# Altium PCB PCB1.PcbDoc
Units mil, origin at the board's own origin, x right, y up, seen from the top; angles counter-clockwise.
Board outline 669.29 x 5873.62 mil, 2 copper layers (Top Layer, Bottom Layer); 75 components, 49 nets, 262 pads, 87 vias.
Unrouted connection lines stored in the file: 3.
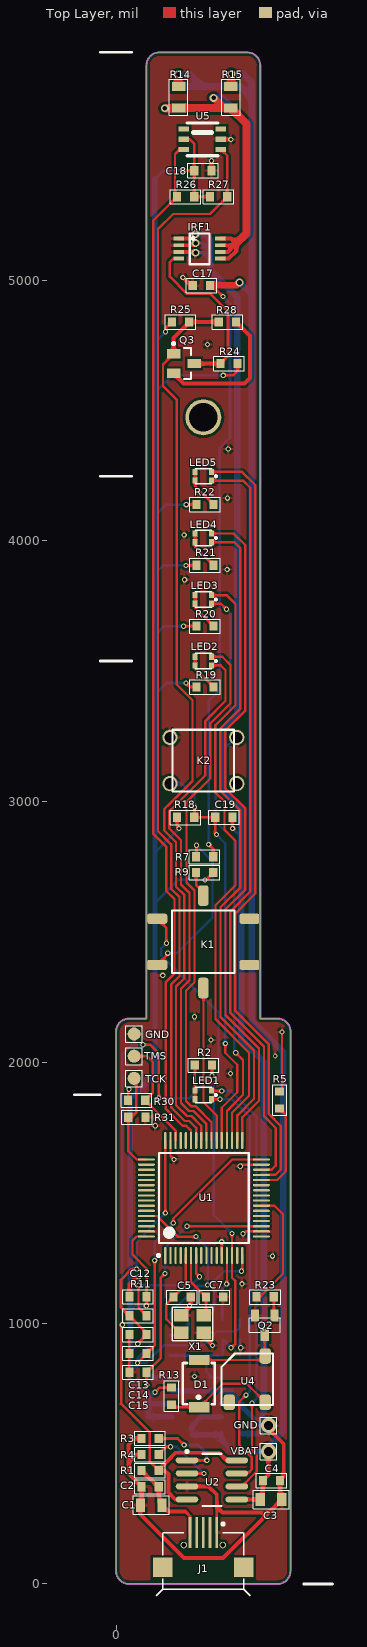
[diagram p0: Top Layer view]
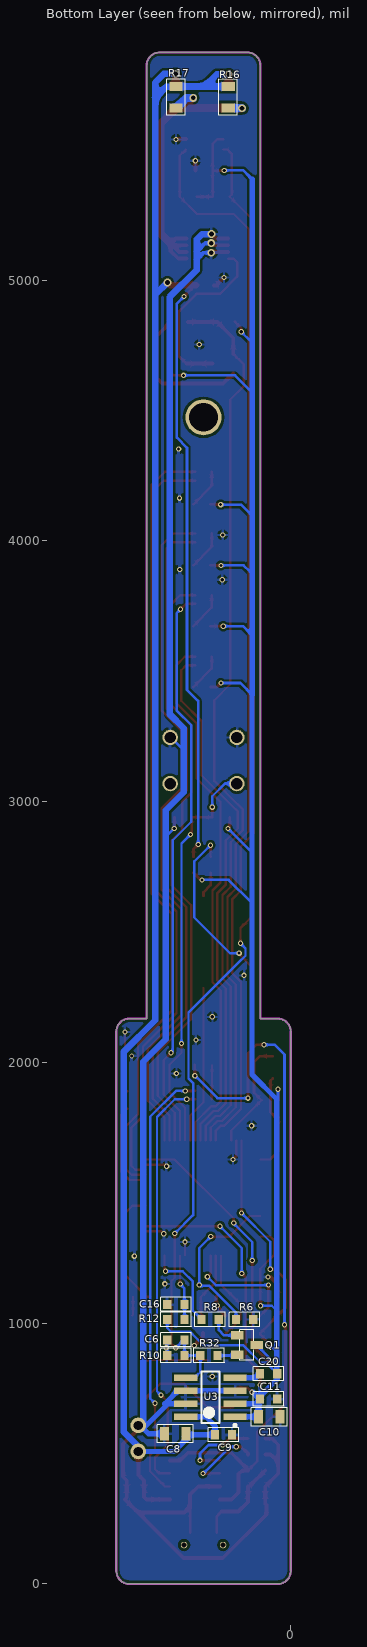
[diagram p1: Bottom Layer view, seen from below]

## Layer stack, top to bottom
Top Solder: solder mask 0.4, Solder Resist, Dk 3.5
Top Layer: signal copper 1.4
Dielectric1: dielectric 12.6, FR-4, Dk 4.8
Bottom Layer: signal copper 1.4
Bottom Solder: solder mask 0.4, Solder Resist, Dk 3.5

## Board outline
0,50 0,2118.11 cw(c50,2118.11) 50,2168.11 116.54,2168.11 116.54,5823.62 116.53,5823.62 cw(c166.53,5823.62) 166.53,5873.62 502.76,5873.62 cw(c502.76,5823.62) 552.76,5823.62 552.76,2168.11 619.29,2168.11 cw(c619.29,2118.11) 669.29,2118.11 669.29,50 669,50 cw(c619,50) 619,0 50,0 cw(c50,50)

## Design rules (kind name [scope] priority, off if disabled: settings)
Clearance [All] p1: gap=10
HoleSize [All] p1: absolutevalues=TRUE maxlimit=1000 minlimit=1 maxpercent=80.000 minpercent=20.000
MinimumSolderMaskSliver [All] p1: minsoldermaskwidth=0
PolygonConnect [All] p1: connectstyle=Relief reliefconductorwidth=10 reliefentries=4 polygonreliefangle="90 Angle" airgapwidth=10
RoutingVias [All] p1: holewidth=12 width=20 viastyle="Through Hole" minholewidth=12 minwidth=20 maxholewidth=28 maxwidth=50
SilkToSilkClearance [All] p1: silktosilkclearance=0
SilkToSolderMaskClearance SilkscreenOverComponentPads [IsPad] p1: minsilkscreentomaskgap=0 clearancetoexposedcopper=TRUE
SolderMaskExpansion [All] p1: expansion=1
Width [All] p1: maxlimit=50 minlimit=8 preferedwidth=10
26 further rules are at their usual default settings.

## Components (designator, comment, footprint, x,y, rotation, side; value= is the part's Value field where it differs from the comment)
C1 "Capacitor-0805" 0805 176,302 r180 top
C2 "Capacitor-0603" 0603 98,373 r0 top
C3 "Capacitor-0805" 0805 553,324 r0 top
C4 "Capacitor-0603" 0603 629,397 r180 top
C5 "Capacitor-0805" 0603 286,1100 r180 top
C6 "Capacitor-0603" 0603 473.85,936 r180 bottom
C7 "Capacitor-0805" 0603 411,1100 r180 top
C8 "Capacitor-0805" 0805 484.68,576 r180 bottom
C9 "Capacitor-0603" 0603 291,572 r180 bottom
C10 "Capacitor-0805" 0805 41,641 r0 bottom
C11 "Capacitor-0603" 0603 118,709 r180 bottom
C12 "Capacitor-0603" 0603 51,1101 r0 top
C13 "Capacitor-0603" 0603 51,956.5 r0 top
C14 "Capacitor-0603" 0603 51,884.25 r0 top
C15 "Capacitor-0603" 0603 51,812 r0 top
C16 "Capacitor-0603" 0603 473.85,1072 r180 bottom
C17 "Capacitor-0603" 0603 360,4980 r180 top
C18 "Capacitor-0603" 0603 300,5420 r0 top
C19 "Capacitor-0603" 0603 380,2940 r0 top
C20 "Capacitor-0805" 0603 118,806 r180 bottom
D1 "IN5824" IN5824 319,859 r270 top
GND "焊盘" 测点 69,2109 r0 top (schematic designator P5)
GND "焊盘" 测点 585,608 r0 top (schematic designator P4)
IRF1 "IRF7601-1" IRF7601_Micro 320,5120 r0 top
J1 "MINIUSB" MicoUsb 334.65,196.85 r270 top
K1 "TL3240" TL3240 334.65,2462.6 r0 top
K2 "轻触开关" 四脚轻触开关（6*6*5） 334.65,3157.87 r0 top
LED1 "LED0603*2" LED0603*2 334.65,1875.59 r90 top
LED2 "LED0603*2" LED0603*2 334.65,3539.37 r90 top
LED3 "LED0603*2" LED0603*2 334.65,3775.59 r90 top
LED4 "LED0603*2" LED0603*2 334.65,4011.81 r90 top
LED5 "LED0603*2" LED0603*2 334.65,4248.03 r90 top
Q1 "BC847" BC847B 205.8,953.4 r180 bottom
Q2 "BC847" BC847B 607.4,1029.8 r270 top
Q3 "MOSFET_N" MOSFET_N 260,4680 r0 top
R1 "Resistor-0603" 0603 163.85,435.23 r180 top
R2 "Resistor-0603" 0603 368,1990 r180 top
R3 "Resistor-0603" 0603 98,558 r0 top
R4 "Resistor-0603" 0603 98,496.33 r0 top
R5 "Resistor-0603" 0603 627,1889 r270 top
R6 "Resistor-0603" 0603 144,1014.56 r0 bottom
R7 "Resistor-0603" 0603 307,2789 r0 top
R8 "Resistor-0603" 0603 276,1014.56 r0 bottom
R9 "Resistor-0603" 0603 307,2728 r0 top
R10 "Resistor-0603" 0603 408,876 r0 bottom
R11 "Resistor-0603" 0603 51,1028.75 r0 top
R12 "Resistor-0603" 0603 473.85,1014 r180 bottom
R13 "Resistor-0603" 0603 213,687 r90 top
R14 "Resistor-0805" 0805 240,5660 r90 top
R15 "Resistor-0805" 0805 440,5660 r90 top
R16 "Resistor-0805" 0805 240,5660 r90 bottom
R17 "Resistor-0805" 0805 440,5660 r90 bottom
R18 "Resistor-0603" 0603 300,2940 r180 top
R19 "Resistor-0603" 0603 374.02,3440 r180 top
R20 "Resistor-0603" 0603 374.02,3673.33 r180 top
R21 "Resistor-0603" 0603 374.02,3906.67 r180 top
R22 "Resistor-0603" 0603 374.02,4140 r180 top
R23 "Resistor-0603" 0603 605,1101 r180 top
R24 "Resistor-0603" 0603 400,4680 r0 top
R25 "Resistor-0603" 0603 280,4840 r180 top
R26 "Resistor-0603" 0603 300,5320 r180 top
R27 "Resistor-0603" 0603 360,5320 r0 top
R28 "Resistor-0603" 0603 460,4840 r180 top
R30 "Resistor-0603" 0603 112,1855 r180 top
R31 "Resistor-0603" 0603 47,1790 r0 top
R32 "Resistor-0603" 0603 347,876 r180 bottom
TCK "焊盘" 测点 69,1939 r0 top (schematic designator P1)
TMS "焊盘" 测点 69,2024 r0 top (schematic designator P2)
U1 "STM32F103RBT6" STM32F103RBT6 188.89,1259.68 r90 top
U2 "TP4056" TP4056 367.47,399 r0 top
U3 "LT1763" LT1963 214.02,641 r0 bottom
U4 "Speaker" Speaker（5*5*2.0） 572,874 r0 top
U5 "SHIT21" SHT21 260,5580 r0 top
VBAT "焊盘" 测点 585,508 r0 top (schematic designator P3)
X1 "3225无源晶振" 3225无源晶振 336.61,1030 r180 top

## Footprints (in the part's own frame and the unit in brackets; to place one, negate y for a bottom-side part, rotate by r counter-clockwise, add the part's x,y. Pads: shape width x height; smd on the part's side, far side on the other; paste and mask are expansions set on the pad)
0603 [mm] "0603"
  rect 0.8x0.9 smd: 1(0,0) 2(1.676,0)
  silkscreen extent -0.65,-0.69 2.32,0.7, body extent 0.1,-0.4 1.7,0.4, height 0.5
0805 [mm] "Chip Resistor, 2-Leads, Body 2.0x1.2mm, IPC Medium Density"
  rect 0.9x1.3 smd: 1(0,0) 2(2.1,0)
  silkscreen extent -0.7,-0.9 2.8,0.9, body extent 0.05,-0.6 2.05,0.6, height 0.5
3225无源晶振 [mm]
  rect 1.4x1.2 smd: 1(0,0) 2(2.2,0) 3(2.2,1.7) 4(0,1.7)
  silkscreen extent -0.86,-0.79 3.1,2.46
BC847B [mm] "SOT23, 3-Leads, Body 2.90x2.45mm, Pitch 0.95mm, IPC Medium Density"
  rect 1.2x0.8 smd: 1(0,-1.9) 2(0,0) 3(1.9,-0.95)
  silkscreen extent 0.24,-2.45 1.63,0.55, body extent 0.25,-2.45 1.65,0.55, height 1.1
IN5824 [mm]
  rect 1x2 smd: 1(0,0) 2(4.6,0)
  silkscreen extent 0.3,-1.6 4.3,1.5
IRF7601_Micro [mm]
  rect 1.04x0.38 smd: 1(-2.032,1) 2(-2.032,0.35) 3(-2.032,-0.3) 4(-2.032,-0.95) 5(2.032,-0.95) 6(2.032,-0.3) 7(2.032,0.35) 8(2.032,1)
  silkscreen extent -0.95,-1.5 0.95,1.5
LED0603*2 [mm]
  rect 0.6x0.5 smd: 1(-0.425,0.8) 2(0.425,0.8) 3(0.425,-0.8) 4(-0.425,-0.8)
  silkscreen extent -0.75,-1.29 0.75,0.8
LT1963 [mm]
  rect 2.25x0.6 smd: 1(0,0) 2(0,-1.27) 3(0,-2.54) 4(0,-3.81) 5(4.8,-3.81) 6(4.8,-2.54) 7(4.8,-1.27) 8(4.8,0)
  silkscreen extent -0.12,-4.41 3.27,0.97, body extent 0.41,-4.41 4.4,0.6, height 1.75
MicoUsb [mm]
  rect 3x0.25 smd: 1(0,-1.3) 2(0,-0.65) 3(0,0) 4(0,0.65) 5(0,1.3)
  round 0.635 hole 0.457 unplated: MH1(1.208,1.9) MH2(1.208,-1.9)
  rect 1.9x1.9 smd: ""(3.358,3.95) ""(3.358,-3.95)
  silkscreen extent -0.96,-4.57 6.14,4.57
MOSFET_N [mm]
  rect 1.3x0.9 smd: 1(-1,0.95) 2(-1,-0.95) 3(1,0)
  silkscreen extent -1.12,-1.5 0.7,2.07, body extent -0.7,-1.52 0.7,1.52, height 1.1
SHT21 [mm]
  rect 1x0.5 smd: 1(0,0) 2(3.6,0) 3(0,-1) 4(3.6,-1) 5(0,-2) 6(3.6,-2)
  silkscreen extent 0.3,-2.62 3.3,0.58
Speaker（5*5*2.0） [mm]
  rrect50% 1.1x1.5 smd: 1(0,0) 2(0,-4.5) 3(-3.5,-4.5)
  silkscreen extent -4.25,-4.75 0.75,0.25
STM32F103RBT6 [mm]
  oval 1.65x0.22 smd: 1(0,0) 2(0,-0.5) 3(0,-1) 4(0,-1.5) 5(0,-2) 6(0,-2.5) 7(0,-3) 8(0,-3.5) 9(0,-4) 10(0,-4.5) 11(0,-5) 12(0,-5.5) 13(0,-6) 14(0,-6.5) 15(0,-7) 16(0,-7.5) 33(11.2,-7.5) 34(11.2,-7) 35(11.2,-6.5) 36(11.2,-6) 37(11.2,-5.5) 38(11.2,-5) 39(11.2,-4.5) 40(11.2,-4) 41(11.2,-3.5) 42(11.2,-3) 43(11.2,-2.5) 44(11.2,-2) 45(11.2,-1.5) 46(11.2,-1) 47(11.2,-0.5) 48(11.2,0)
  oval 0.22x1.65 smd: 17(1.85,-9.35) 18(2.35,-9.35) 19(2.85,-9.35) 20(3.35,-9.35) 21(3.85,-9.35) 22(4.35,-9.35) 23(4.85,-9.35) 24(5.35,-9.35) 25(5.85,-9.35) 26(6.35,-9.35) 27(6.85,-9.35) 28(7.35,-9.35) 29(7.85,-9.35) 30(8.35,-9.35) 31(8.85,-9.35) 32(9.35,-9.35) 49(9.35,1.85) 50(8.85,1.85) 51(8.35,1.85) 52(7.85,1.85) 53(7.35,1.85) 54(6.85,1.85) 55(6.35,1.85) 56(5.85,1.85) 57(5.35,1.85) 58(4.85,1.85) 59(4.35,1.85) 60(3.85,1.85) 61(3.35,1.85) 62(2.85,1.85) 63(2.35,1.85) 64(1.85,1.85)
  silkscreen extent -0.12,-8.13 9.97,0.78, body extent 0.6,-8.75 10.6,1.25, height 1.6
TL3240 [mm]
  rrect50% 2x1 smd: 1(4.5,2.25) 2(-4.5,2.25) 3(4.5,-2.25) 4(-4.5,-2.25)
  rrect50% 1x2 smd: 5(0,-4.5) 6(0,4.5)
  silkscreen extent -3.05,-3.05 3.05,3.05
TP4056 [mm] "SOP, 8-Leads, Body 5.1x4.0mm (max), Pitch 1.27mm, IPC Medium Density"
  oval 2.2x0.6 smd: 1(-2.425,1.905) 2(-2.425,0.635) 3(-2.425,-0.635) 4(-2.425,-1.905) 5(2.425,-1.905) 6(2.425,-0.635) 7(2.425,0.635) 8(2.425,1.905)
  rect 0x0 smd: 9(0,0)
  silkscreen extent -2.55,-2.55 0.93,2.88, body extent -2,-2.55 2,2.55, height 1.75
四脚轻触开关（6*6*5） [mm]
  round 1.5 hole 1.1: 1(-3.25,2.25) 2(3.25,2.25) 3(-3.25,-2.25) 4(3.25,-2.25)
  silkscreen extent -3,-3 3,3
测点 [mil]
  round 50 smd: 1(0,0)
  silkscreen extent -32,-32 32,32

## Part data
C5 C7: library part Capacitor-0
C20: library part Capacitor
D1: library part I
IRF1: library part Component_1, "IRF7601"

## Free pads (board coordinates)
  round 60 hole 35.43: 5(585,508) 5(585,608)
  round 137.8 hole 110.24: 6(334.65,4474)

## Via types
v1: diameter 20, hole 12, Top Layer to Bottom Layer, 78 vias
v2: diameter 30, hole 18, Top Layer to Bottom Layer, 8 vias
v3: diameter 18, hole 12, Top Layer to Bottom Layer, 1 vias

## Nets (pads, with @x,y where several pads share a name; then routed paths per layer and width w, separated by ;. In a path a pad name is that pad's centre, name@x,y a point inside that pad or via, vN(x,y) a via of type N, cw(c..) or ccw(c..) an arc to the next point about the centre after c; other vN are vias at no path point)
AD: C6.2 K1.1 K1.2 R10.1 R32.1 U1.14 U3.5 | length 2105.7
  Top Layer w9: K1.2 193,2515.66 v1(193,2457) ; v1(441,906) 442,905 457.5,920.5 457.5,1161.5 444.8,1174.2 U1.14 v1(444.8,1344.2)
  Bottom Layer w9: v1(193,2457) 173.5,2437.5 173.5,2408.85 187.85,2394.5 189.5,2394.5 392.5,2191.5 392.5,1938.85 374.5,1920.85 374.5,1414.5 v1(444.8,1344.2) ; U3.5 368,791 347,812 R32.1 R10.1 407.85,876.15 C6.2 411,936 v1(441,906)
BOOT0: R6.2 U1.60 | length 639.8
  Top Layer w9: U1.60 157.09,1411.26 237.35,1331 306,1331 v1(307,1332)
  Bottom Layer w9: R6.2 210,1041.13 311.87,1143 348,1143 v1(351,1146) 351,1288 v1(307,1332)
BOOT1: R5.2 U1.28 | length 358.4
  Top Layer w9: U1.28 618.06,1549.06 650.79,1581.79 650.79,1799.21 R5.2
GND: C1.2 C2.1 C3.2 C4.1 C5.1 C6.1 C7.1 C8.1 C9.2 C10.1 C11.2 C12.1 C13.1 C14.1 C15.1 C16.1 C17.2 C18.2 C19.2 GND.1 IRF1.1 IRF1.2 IRF1.3 J1.5 K2.1 K2.2 pad.5@585,608 Q2.1 R3.1 R4.1 R5.1 R6.1 R10.2 R31.2 U1.12 U1.18 U1.31 U1.47 U1.63 U2.3 U3.3 U3.6 U3.7 U5.4 X1.2 X1.4 | length 8868.2
  Top Layer w9: U1.47 208.57,1641.43 v1(222,1628) ; J1.5 385.83,252.83 386,253 386,297 ; U1.12 v1(405.43,1312) ; v1(476,1602) 482.11,1608.11 U1.31 ; v1(478,906) v1@478,907 ; v1(487,1343) 496.2,1352.2 U1.18 ; R5.1 636,1898 v1(636,2117)
  Top Layer w10: C15.1 C14.1 C13.1 ; C19.2 446,2898 v1(447,2897)
  Top Layer w15: C12.1 51,1149.89 78.11,1177 v1(87,1177) ; R4.1 77.33,496.33 48,467 ; R3.1 72,558 48,534 48,467 ; IRF1.3 301.81,5108.19 v2(305,5105) ; IRF1.2 296.78,5133.78 v2(305,5142) ; IRF1.1 286.37,5159.37 v2(304,5177) ; X1.2 281,1061 v1(281,1068) 286,1073 C5.1 ; v1(256,5010) 286,4980 C17.2 ; U2.3 355,374 386,343 386,297 407,276 407,274 585.68,274 ; X1.4 336.61,948.39 v1(370,915) ; C18.2 v1(366,5458) ; U5.4 439.37,5540.63 v1(440,5540) ; GND.1@566,608 571,608 643,536 643,411 C4.1 629,330.68 C3.2 585.68,274 ; 48,467 48,423 C2.1 98,306.68 C1.2 93.32,266.68 261,99 410.68,99 585.68,274
  Bottom Layer w9: C6.1 473.85,910.15 v1(478,906) 474,902 R10.2
  Bottom Layer w10: 410.57,3198 459.03,3246.46 K2.2 ; v1(447,2897) 480,2864 480,2862
  Bottom Layer w15: v2(305,5105) 335,5105 361,5079 ; v2(305,5142) 328,5142 361,5109
  Bottom Layer w20: U3.3 U3.6 433,741 483,691 ; U3.7 471,691 566,596 546,576 C8.1
  Bottom Layer w25: v2(304,5177) 340,5177 361,5156 361,5109 361,5079 361,5039 465,4935 465,3336 410.57,3281.57 410.57,3198 410.57,3036.43 480,2967 480,2864 ; 480,2862 480,2089 566,2003 pad.5@566,596
  other v1: 301,796 483,1151 600,1257 150,1757 439,1958 364,2086 301,2175 179,2334 263,3851 426,3890 261,4023 427,4164 430,4352 351,4753
  other v3: 610,2025
JTCK: R31.1 TCK.1 U1.49 | length 385.1
  Top Layer w9: R31.1 47,1660 79.2,1627.8 U1.49
  Top Layer w10: R31.1 59.25,1790 78,1808.75 78,1930 TCK.1
JTMS: R30.1 TMS.1 U1.46 | length 442.1
  Top Layer w9: R30.1 228.26,1738.74 U1.46
  Top Layer w10: TMS.1 118,2024 141,2001 141,1884 R30.1
KEY: C19.1 K2.3 K2.4 R18.1 U1.37 | length 1575
  Top Layer w9: v1(301,2979) 301,2941 R18.1 C19.1 380,2879 v1(385,2874) ; U1.37 405.43,1826.43 465,1886 465,1991 419,2037 v1(419,2073)
  Bottom Layer w9: K2.3 252.71,3069.29 301,3021 v1(301,2979) ; v1(385,2874) 419,2840 v1(419,2073)
LED1_G: LED2.3 U1.39 | length 2056.3
  Top Layer w9: U1.39 366.06,1770.94 304.45,1832.55 287.3,1832.55 268,1851.85 268,2275 300.46,2307.46 300.46,2658.96 269.75,2689.67 269.75,2998.25 361.57,3090.07 361.57,3300.57 438.76,3377.76 438.76,3524.24 406.9,3556.1 LED2.3
LED1_R: LED2.4 U1.40 | length 2051
  Top Layer w9: U1.40 346.37,1763.76 296.58,1813.55 279.43,1813.55 249,1843.98 249,2282.87 281.46,2315.33 281.46,2649.54 249,2682 249,2852 203.75,2897.25 203.75,2963.72 212.25,2972.22 213.35,2972.22 342.57,3101.44 342.57,3309.57 419.76,3386.76 419.76,3504.24 401.36,3522.64 LED2.4
LED2_G: LED3.3 U1.35 | length 2339.2
  Top Layer w9: LED3.3 423.68,3792.32 457.76,3758.24 457.76,3369.76 380.57,3292.57 380.57,3035.31 415.75,3000.13 415.75,2892.25 457.76,2850.24 457.76,2679.24 381.44,2602.92 381.44,2166.08 510,2037.52 510,1872 444.8,1806.8 U1.35
LED2_R: LED3.4 U1.36 | length 2201.4
  Top Layer w9: LED3.4 402.14,3758.86 v1(423,3738) ; U1.36 425.11,1814.11 487,1876 487,2009 v1(459,2037)
  Bottom Layer w9: v1(423,3738) 438,3723 438,3350 382,3294 382,2923 453,2852 453,2043 v1(459,2037)
LED3_G: LED4.3 U1.33 | length 2606.2
  Top Layer w9: LED4.3 450.46,4028.54 495.76,3983.24 495.76,3349.76 418.57,3272.57 418.57,3051.05 495.76,2973.87 495.76,2663.5 419.44,2587.18 419.44,2181.82 548,2053.26 548,1853 484.17,1789.17 U1.33
LED3_R: LED4.4 U1.34 | length 2567.2
  Top Layer w9: LED4.4 453.92,3995.08 476.76,3972.24 476.76,3357.63 399.57,3280.44 399.57,3043.18 476.76,2966 476.76,2671.37 400.44,2595.05 400.44,2173.95 529,2045.39 529,1860.87 465.17,1797.04 465.17,1701.31 U1.34
LED4_G: LED5.3 U1.29 | length 2999.6
  Top Layer w9: LED5.3 483.24,4264.76 533.76,4214.24 533.76,2647.76 457.44,2571.44 457.44,2197.56 586,2069 586,1802 631.29,1756.71 631.29,1589.87 610.16,1568.74 U1.29
LED4_R: LED5.4 U1.30 | length 2925
  Top Layer w9: LED5.4 487.3,4231.3 514.76,4203.84 514.76,2655.63 438.44,2579.31 438.44,2189.69 567,2061.13 567,1794.13 612.29,1748.84 612.29,1604.29 596.43,1588.43 U1.30
NetC5_2: C5.2 U1.5 X1.3 | length 353.9
  Top Layer w9: X1.3 245.24,963.07 193,1015.31 193,1073 C5.2 267.63,1147.63 U1.5
NetC7_2: C7.2 U1.6 X1.1 | length 257.1
  Top Layer w9: U1.6 287.31,1157.69 C7.2 345,1038.39 X1.1
NetC16_2: C16.2 R12.2 U1.13 | length 252.8
  Top Layer w9: v1(424,1150) 425.11,1151.11 U1.13
  Bottom Layer w10: R12.2 C16.2 407.85,1133.85 v1(424,1150)
NetC20_1: C20.1 U3.4 | length 102.2
  Bottom Layer w20: C20.1 133,791 U3.4
NetD1_1: D1.1 Q2.3 U4.1 | length 341
  Top Layer w9: D1.1 557,859 U4.1 570,876 Q2.3
NetD1_2: D1.2 R13.1 U4.2 | length 429.6
  Top Layer w9: R13.1 222.1,677.9 D1.2 409.1,768 500.83,768 U4.2
NetIRF1_4: IRF1.4 Q3.3 R24.1 | length 687
  Top Layer w10: IRF1.4 219.6,5082.6 206,5069 206,5013.32 272.04,4947.28 361.72,4947.28 429.25,4879.75 429.25,4710.75 430,4710 R24.1
  Top Layer w15: Q3.3 R24.1
NetIRF1_5: IRF1.5 IRF1.6 IRF1.7 IRF1.8 R14.1 R15.1 R16.1 R17.1 | length 1304.3
  Top Layer w15: IRF1.5 431.6,5082.6 461,5112 461,5140 ; IRF1.6 429.19,5108.19 454.78,5133.78 ; IRF1.7 454.78,5133.78 ; IRF1.8 441.63,5159.37 461,5140 ; 454.78,5133.78 461,5140
  Top Layer w30: v2(187,5659) 239,5659 R14.1 413,5660 ; v2(374,5699) 413,5660 ; 461,5140 500,5179 500,5600 R15.1 413,5660
  Bottom Layer w30: v2(187,5659) 188,5660 R16.1 ; v2(374,5699) 401,5699 R17.1
NetK1_3: K1.3 K1.4 R7.1 | length 637.6
  Top Layer w9: K1.4 198,2414.54 v1(198,2419) ; R7.1 308,2790 v1(308,2833)
  Bottom Layer w9: v1(198,2419) 233,2419 370,2556 370,2771 v1(308,2833)
NetK1_6: K1.6 R9.1 | length 99.7
  Top Layer w10: R9.1 307,2680 334.65,2652.35 K1.6
NetLED1_1: LED1.1 LED1.2 R2.2 | length 131.6
  Top Layer w9: R2.2 302,1893.47 LED1.2 LED1.1
NetLED1_3: LED1.3 U2.6 | length 1690.2
  Top Layer w9: LED1.3 367.47,1891 v1(405,1891) ; U2.6 481.87,374 539.75,431.88 539.75,494.25 521,513 v1(521,693)
  Bottom Layer w9: v1(405,1891) 440,1891 538.63,1792.37 538.63,710.63 v1(521,693)
NetLED1_4: LED1.4 U2.7 | length 1628.4
  Top Layer w9: LED1.4 366.28,1859 v1(399,1859) ; U2.7 505,424 520.75,439.75 520.75,485.25 472,534 472,699 497,724 v1(498,724)
  Bottom Layer w9: v1(399,1859) 445,1859 513,1791 513,739 v1(498,724)
NetLED2_1: LED2.1 LED2.2 R19.1 | length 145.5
  Top Layer w10: LED2.2 LED2.1 303.15,3510.87 R19.1
NetLED3_1: LED3.1 LED3.2 R20.1 | length 148.3
  Top Layer w10: LED3.2 LED3.1 303.15,3744.2 R20.1
NetLED4_1: LED4.1 LED4.2 R21.1 | length 151.2
  Top Layer w10: LED4.2 LED4.1 303.15,3977.53 R21.1
NetLED5_1: LED5.1 LED5.2 R22.1 | length 154.1
  Top Layer w10: LED5.2 LED5.1 303.15,4210.87 R22.1
NetQ1_1: Q1.1 R32.2 | length 76.3
  Bottom Layer w10: Q1.1 208.4,876 R32.2
NetQ1_2: Q1.2 R8.1 | length 119.3
  Bottom Layer w10: Q1.2 255.4,953.4 276,974 R8.1
NetQ2_2: Q2.2 R23.1 | length 72.2
  Top Layer w9: R23.1 605,1032.2 Q2.2
NetQ3_2: Q3.2 R28.1 | length 555.4
  Top Layer w15: Q3.2 259.23,4604 493,4604 514,4625 514,4786 R28.1
NetR1_1: R1.1 R2.1 U2.4 U2.8 | length 2816.7
  Top Layer w10: v1(24,994) 20.25,990.25 20.25,692.93 19,691.68 128.75,581.93 128.75,470.33 R1.1 ; v1(103,2068) 131,2068 164,2035 v1(164,1863) ; v1(368,1949) R2.1
  Top Layer w15: U2.4 227,324 201,350 201,421 188,434 165.08,434 R1.1 163.85,438.8 186.17,461.12 187,461.12 197.25,471.37 197.25,472.2 228.36,503.31 394.69,503.31 424,474 U2.8
  Bottom Layer w10: v1(24,994) 24,2030 62,2068 v1(103,2068) ; v1(164,1863) 282,1863 v1(368,1949)
NetR3_2: R3.2 U2.1 | length 310
  Top Layer w10: R3.2 236,558 v1(261,533) ; U2.1 v1(348,474)
  Bottom Layer w10: v1(261,533) 315,533 348,500 v1(348,474)
NetR4_2: R4.2 U2.2 | length 294.6
  Top Layer w10: R4.2@164,499.79 190.21,526 v1(209,526) ; U2.2 v1(337,424)
  Top Layer w15: R4.2 R4.2@164,499.79
  Bottom Layer w10: v1(209,526) 232.64,526 334.64,424 v1(337,424)
NetR11_2: R11.2 U1.7 | length 464.4
  Top Layer w9: v1(86,1146) 86,1059.75 R11.2 ; U1.7 307,1191 v1(320,1178)
  Bottom Layer w9: v1(86,1146) 288,1146 v1(320,1178)
PA8: Q3.1 R25.1 R28.2 U1.41 | length 3482.3
  Top Layer w9: Q3.1 180,4676.77 180,4594 232,4542 232,3450 293,3389 293,3079 205.22,2991.22 204.38,2991.22 184.75,2971.59 184.75,2889.38 230,2844.13 230,2674.13 262,2642.13 262,2323 230,2291 230,1836.11 271.56,1794.55 288.71,1794.55 326.68,1756.57 U1.41
  Top Layer w15: Q3.1 220.63,4778.63 280,4838 R25.1 R28.2
PLED: K1.5 U1.38 | length 606
  Top Layer w9: K1.5 335,2285.08 335,1847 385.74,1796.26 U1.38
POWER: R8.2 U1.16 | length 342.7
  Top Layer w9: v1(481,1199) 484.17,1202.17 U1.16
  Bottom Layer w9: R8.2 375.5,1048.06 375.5,1159.5 415,1199 v1(481,1199)
SCL: R26.2 U1.43 U5.5 | length 3961.5
  Top Layer w9: U5.5 243.26,5501.26 226,5484 226,5328 R26.2 142,5228 142,2878.39 192,2828.39 192,2658.39 224,2626.39 224,2341 191,2308 191,1821.37 255.82,1756.55 269.45,1756.55 287.31,1738.69 U1.43
SDA: R27.2 U1.42 U5.6 | length 4100.1
  Top Layer w9: U1.42 307,1749.39 280.84,1775.55 263.69,1775.55 211,1828.24 211,2298.87 243,2330.87 243,2634.26 211,2666.26 211,2836.26 161,2886.26 161,5196 219,5254 360,5254 R27.2 426,5476.99 U5.6
SPEAKER: R23.2 U1.23 | length 462.4
  Top Layer w9: R23.2 551.03,1101 640,1189.97 640,1418 607.37,1450.63 U1.23
VBAT: C3.1 C4.2 C8.2 C9.1 C17.1 pad.5@585,508 R7.2 R14.2 R15.2 R16.2 R17.2 U2.5 U3.8 VBAT.1 | length 9153.9
  Top Layer w10: v1(355,2836) 373,2818 R7.2 ; C17.1 367,4980 v1(410,4937)
  Top Layer w15: U2.5 C3.1 563,334 C4.2 584,418 584,490 VBAT.1@566,508
  Top Layer w25: v2(238,5790) 238,5744.68 R14.2 ; C17.1@362,4981 463,4981 v2(473,4991) ; R15.2 442,5744.68 v2(442,5791)
  Bottom Layer w10: v1(355,2836) 355,3386 398,3429 398,4357 437,4396 437,4910 v1(410,4937)
  Bottom Layer w20: U3.8 326,641 291,606 C9.1 398,572 C8.2 402,554 448,508 pad.5@566,508
  Bottom Layer w25: v2(238,5790) 283.68,5790 331,5742.68 ; R16.2 331,5742.68 ; v2(442,5791) 487,5791 520,5758 520,5699 ; v2(473,4991) 520,4944 ; pad.5@566,508 641.5,583.5 641.5,2040.5 520,2162 520,4944 ; 331,5742.68 R17.2 440.68,5742 477,5742 520,5699 ; 520,4944 520,5699
VCC: C1.1 C2.2 J1.1 R1.2 | length 355.6
  Top Layer w10: 265,278 283.46,259.54 J1.1
  Top Layer w15: R1.2 160.08,373 C2.2 164,314 C1.1 200,278 265,278
VCC3.3: C10.2 C11.1 C12.2 C13.2 C14.2 C15.2 C18.1 C20.2 Q1.3 R9.2 R11.1 R12.1 R13.2 R18.2 R19.2 R20.2 R21.2 R22.2 R24.2 R25.2 R26.1 R27.1 R30.2 U1.19 U1.32 U1.48 U1.64 U3.1 U3.2 U5.3 | length 11289.2
  Top Layer w9: v1(116,1067) 117,1068 C12.2 117,1209 63,1263 63,1317 78.52,1332.52 U1.64 ; v1(149,735) 167,753 R13.2 ; v1(188.89,1422.11) U1.48 ; v1(219,1384) 219,1401 445.8,1627.8 U1.32 ; v1(271.89,1371.89) U1.19
  Top Layer w10: R30.2 46,1894 v1@48.18,1896.18 ; v1(79,1207) 60,1207 19,1166 19,1060.75 R11.1 117,962.75 C13.2 83,922.5 v1(83,921) ; v1(82,848) 117,883 C14.2 148,915.25 v1(148,1240) ; v1(118,763) 117,764 C15.2 172,867 172,1175 v1(188,1191) ; v1(190,4802) 190,4816 R25.2 ; R18.2 234,2904 v1(241,2897) ; v1(255,5421) 256,5420 C18.1 ; v1(259,3673) 259.33,3673.33 R20.2 ; U5.3 281.37,5540.63 300,5522 C18.1 ; v1(268,3455) 283,3440 R19.2 ; v1(268,3906) 307.35,3906 R21.2 ; v1(269,4139) 270,4140 R22.2 ; 350,2705 R9.2 ; R27.1 R26.1 C18.1 ; v1(411,4635) 449,4635 466,4652 R24.2
  Bottom Layer w9: C20.2 54,808 82,836 v1(82,848) ; 54,1048 73,1067 v1(116,1067) ; v1(79,1207) 79,1312.22 v1(188.89,1422.11) ; Q1.3 82,867 v1(82,848) ; v1(148,1240) 148,1311 219,1382 v1(219,1384) ; v1(188,1191) 188,1288 v1(271.89,1371.89) ; R12.1 473.85,981.85 460.22,968.22 386.1,968.22 377.6,959.72 377.6,958.6 335,916 183.33,916 115.33,848 v1(82,848)
  Bottom Layer w10: v1(49,1897) 49,1864 54,1859 ; 54,887 54,892 v1(83,921) ; C11.1 118,720 v1(118,763) ; 147.5,2803.5 149,2805 v1(241,2897) ; 148,3409.83 149,3410.83 193.17,3455 v1(268,3455) ; 148,3637.83 183.17,3673 v1(259,3673) ; 148,5387 182,5421 v1(255,5421) ; 153,4765 v1(190,4802) ; 153.08,4573.92 214.17,4635 v1(411,4635) ; 153.5,2615.5 238,2700 v1(341,2700) ; 157.17,3882 181.17,3906 v1(268,3906) ; 157.17,4105 191.17,4139 v1(269,4139)
  Bottom Layer w20: C20.2 52,786 C11.1@118,720 ; C20.2@54,808 54,887 ; 54,892 54,1048 54,1859 149,1954 149,2805 149,3410.83 ; 148,3409.83 148,3637.83 148,5387 ; v1(149,735) 144,735 C11.1 C11.1@123.68,703.32 ; U3.1 C10.2 C11.1@123.68,703.32 ; U3.2 136,691 C11.1@123.68,703.32
pads on no net: J1. J1.2 J1.3 J1.4 J1.MH1 J1.MH2 U1.1 U1.2 U1.3 U1.4 U1.8 U1.9 U1.10 U1.11 U1.15 U1.17 U1.20 U1.21 U1.22 U1.24 U1.25 U1.26 U1.27 U1.44 U1.45 U1.50 U1.51 U1.52 U1.53 U1.54 U1.55 U1.56 U1.57 U1.58 U1.59 U1.61 U1.62 U2.9 U4.3 U5.1 U5.2

## Polygon pours and split planes (outlines as drawn)
GND on Top Layer "Top Layer-No Net" (solid, remove dead copper, pour order 0): -910,6184 -671,5945 2125,5945 2125,568 825,-732 673,-580 -866,-580
GND on Bottom Layer "Top Layer-No Net" (solid, remove dead copper, pour order 2): -1346,6366 2171,6366 2496,6041 1321,4866 1321,-646 -313,-646 -539,-420

## Keep-outs
Keep-Out Layer:
  lines w8: 669,50 cw(c619,50) 619,0 50,0 cw(c50,50) 0,50 0,2118.11 cw(c50,2118.11) 50,2168.11 116.54,2168.11 116.54,5823.62 cw(c166.53,5823.62) 166.53,5873.62 502.76,5873.62 cw(c502.76,5823.62) 552.76,5823.62 552.76,2168.11 619.29,2168.11 cw(c619.29,2118.11) 669.29,2118.11 669.29,50

## Silkscreen, mask and mechanical layers (free items; w line width, h text height)
Top Overlay:
  lines w10: -160,1875.59 -60,1875.59 ; -60,3539.37 60,3539.37 ; -60,4248.03 60,4248.03 ; -60,5873.62 60,5873.62 ; 720,0 830,0

## Dimensions
757,5873.62 to 830,0 on Top Overlay
-60,3539.37 to -3,3159.6 on Top Overlay
-60,4248.03 to -60,3539.37 on Top Overlay
-121.99,2464.32 to -160,1875.59 on Top Overlay
-60,5873.62 to -60,4248.03 on Top Overlay
88.01,2464.32 to 90.01,3159.6 on Top Overlay
794,4474 to 729,5873.62 on Top Overlay